# Altium PCB PCB_1.PcbDoc
Units mm, origin at the board's own origin, x right, y up, seen from the top; angles counter-clockwise.
Board outline 86.65 x 41.72 mm, 2 copper layers (Top Layer, Bottom Layer); 11 components, 8 nets, 24 pads, 1 vias.
Unrouted connection lines stored in the file: 4.
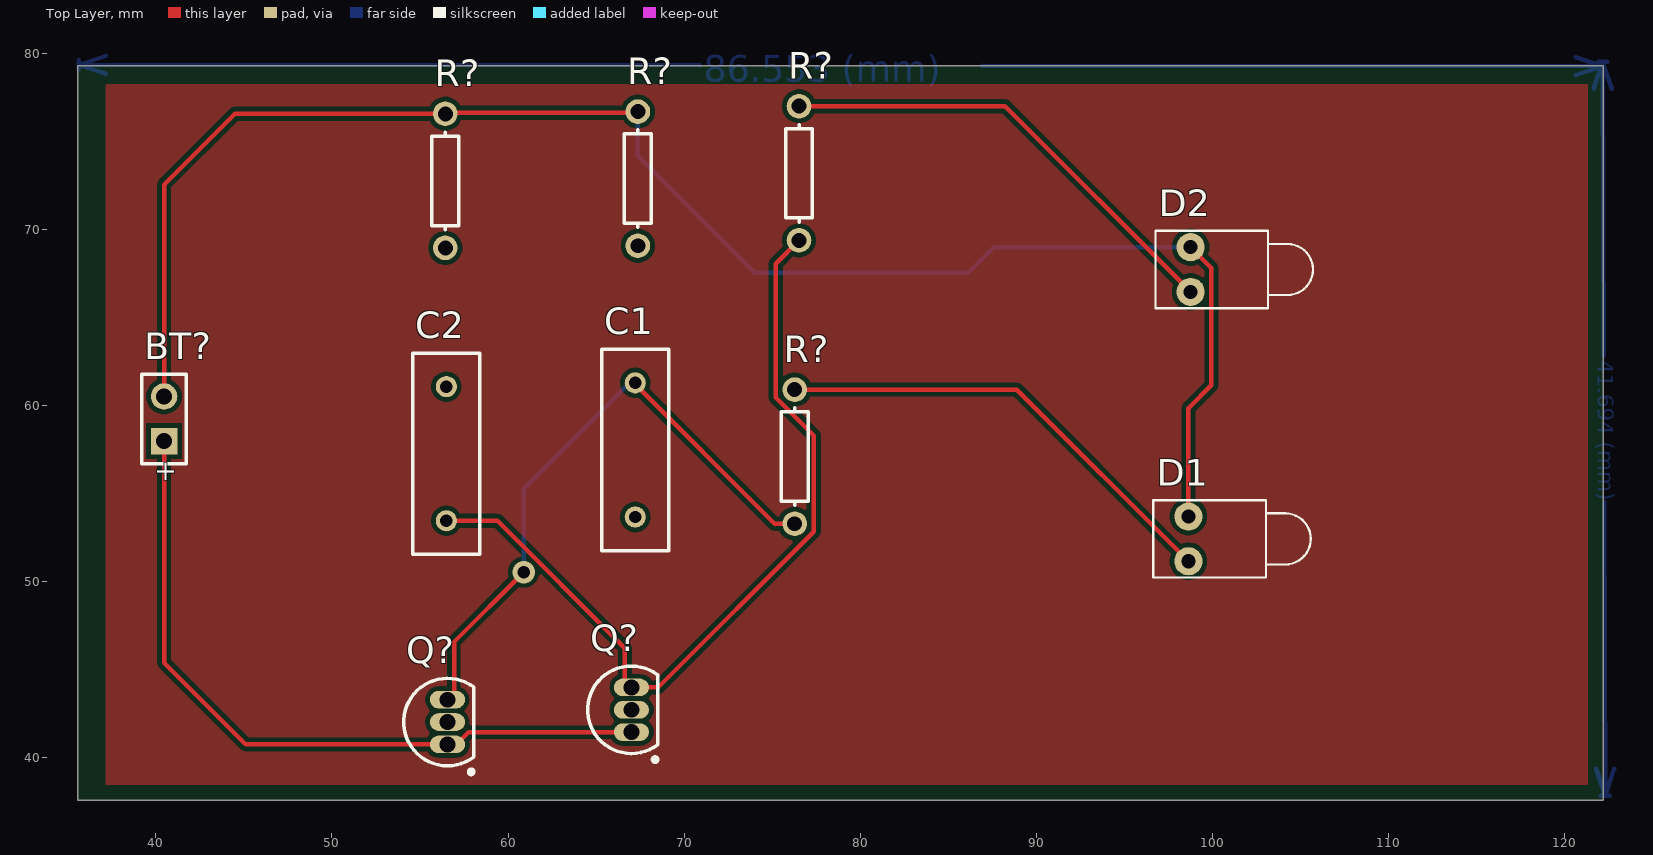
[diagram p0: Top Layer view]
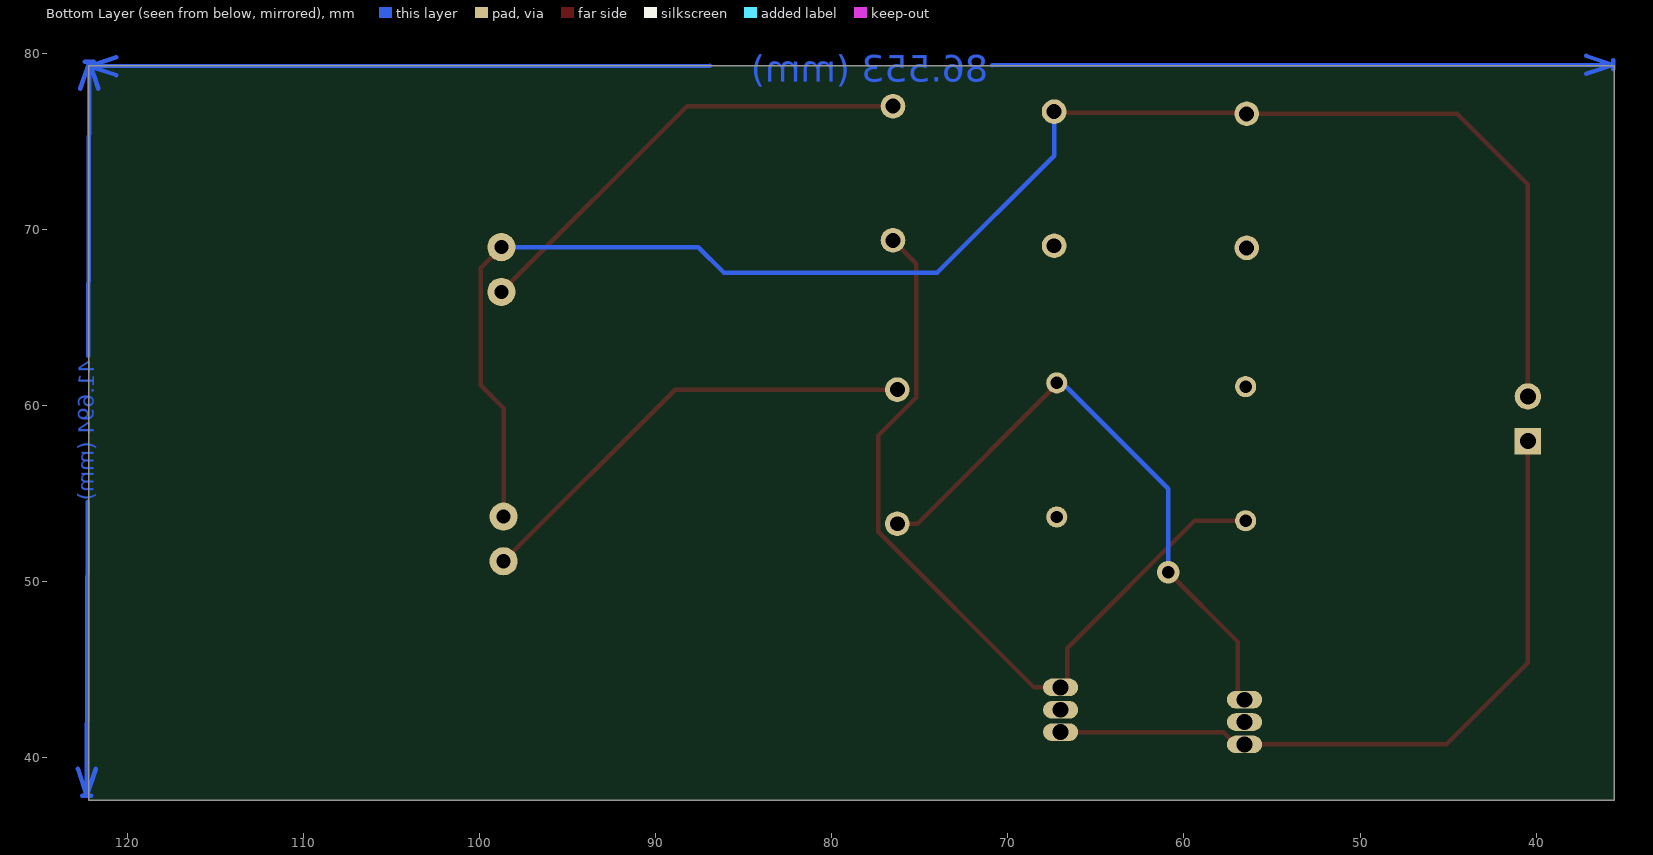
[diagram p1: Bottom Layer view, seen from below]

## Layer stack, top to bottom
Top Solder: solder mask 0.0102, Solder Resist, Dk 3.5
Top Layer: signal copper 0.0356
Dielectric 1: dielectric 0.32, FR-4, Dk 4.8
Bottom Layer: signal copper 0.0356
Bottom Solder: solder mask 0.0102, Solder Resist, Dk 3.5

## Board outline
35.571,37.572 122.219,37.572 122.219,79.296 35.571,79.296

## Design rules (kind name [scope] priority, off if disabled: settings)
Clearance [All] p1: gap=0.254 ignorepadtopadclearanceinfootprint=FALSE except(0: Arc-Hole Track-Hole SMDPad-Hole THPad-Hole Via-Hole Fill-Hole Poly-Hole Region-Hole Text-Hole)
PolygonConnect [All] p1: connectstyle=Relief reliefconductorwidth=0.254 reliefentries=4 polygonreliefangle="90 Angle" airgapwidth=0.254
RoutingVias [All] p1: holewidth=0.711 width=1.27 viastyle="Through Hole" minholewidth=0.711 minwidth=1.27 maxholewidth=0.711 maxwidth=1.27
SolderMaskExpansion [All] p1: expansion=0.102 istentingtop=FALSE
Width [All] p1: maxlimit=0.254 minlimit=0.254 preferedwidth=0.254
30 further rules are at their usual default settings.

## Classes and differential pairs
component class Schematic_1: BT? C2 D1 D2 Q? R? V?

## Components (designator, comment, footprint, x,y, rotation, side; value= is the part's Value field where it differs from the comment)
BT? "Battery" BAT-2 40.462,59.244 r90 top
C1 "Cap" RAD-0.3 67.228,57.475 r90 top value=100pF
C2 "Cap" RAD-0.3 56.499,57.262 r90 top value=100pF
D1 "LED1" LED-1 98.655,52.423 r0 top
D2 "LED1" LED-1 98.777,67.724 r0 top
Q? "2N3904" TO-92A 56.561,42.017 r0 top
Q? "2N3904" TO-92A 67.008,42.714 r0 top
R? "Res1" AXIAL-0.3 76.533,73.193 r90 top value=1K
R? "Res1" AXIAL-0.3 56.439,72.763 r90 top value=1K
R? "Res1" AXIAL-0.3 67.377,72.886 r90 top value=1K
R? "Res1" AXIAL-0.3 76.287,57.093 r90 top value=1K

## Footprints (in the part's own frame and the unit in brackets; to place one, negate y for a bottom-side part, rotate by r counter-clockwise, add the part's x,y. Pads: shape width x height; smd on the part's side, far side on the other; paste and mask are expansions set on the pad)
AXIAL-0.3 [mm] "Axial Device, Thru-Hole; 2 Leads; 0.3 in Pin Spacing"
  round 1.4 hole 0.85: 1(-3.81,0) 2(3.81,0)
  silkscreen extent -2.77,-0.76 2.77,0.76
BAT-2 [mm] "Battery; 2 Leads"
  rect 1.5x1.5 hole 0.9: 1(-1.27,0)
  round 1.5 hole 0.9: 2(1.27,0)
  silkscreen extent -2.54,-1.27 2.54,1.27
LED-1 [mm] "LED; 2 Leads"
  round 1.6 hole 0.8: 1(0,1.27) 2(0,-1.27)
  silkscreen extent -2,-2.2 6.95,2.2
RAD-0.3 [mm] "Radial Cap, Thru-Hole; 2 Leads; 0.3 in Pin Spacing"
  round 1.2 hole 0.7: 1(-3.81,0) 2(3.81,0)
  silkscreen extent -5.71,-1.91 5.71,1.91
TO-92A [mm] "TO, Flat Index; 3 In-Line, Axial Leads; Body Dia. 4.5mm; Leads 0.51 x 0.48 mm (max)"
  oval 2x1 hole 0.9: 1(0,-1.27) 2(0,0) 3(0,1.27)
  silkscreen extent -2.48,-2.95 1.5,2.48, body extent -2.48,-2.5 1.5,2.5, height 6.86

## Part data
BT?: "Multicell Battery", LatestRevisionDate=17-Jul-2002, LatestRevisionNote="Re-released for DXP Platform.", PackageDescription="Battery; 2 Leads", PackageReference=BAT-2, Published=24-Mar-1999, Publisher="Altium Limited"
C1 C2: "Capacitor", LatestRevisionDate=17-Jul-2002, LatestRevisionNote="Re-released for DXP Platform.", PackageDescription="Radial Cap, Thru-Hole; 2 Leads; 0.3 in Pin Spacing", PackageReference=RAD-0.3, Published=8-Jun-2000, Publisher="Altium Limited"
D1 D2: "Typical RED GaAs LED", LatestRevisionDate=08-Jul-2005, LatestRevisionNote="Mech Layer 1 removed.", PackageDescription="LED; 2 Leads", PackageReference=LED-1, Published=8-Jun-2000, Publisher="Altium Limited"
Q? Q?: "NPN General Purpose Amplifier", ComponentLink1Description="Manufacturer Link", ComponentLink1URL=http://www.fairchildsemi.com/, ComponentLink2Description=Datasheet, ComponentLink2URL=http://www.fairchildsemi.com/ds/2N%2F2N3904.pdf, DatasheetVersion=1997, LatestRevisionDate=15-Jan-2003, LatestRevisionNote="PCB Footprint 'BCY-W3/D4.7' replaced", PackageDescription="TO, Flat Index; 3 In-Line, Axial Leads; Body Dia. 4.5mm; Leads 0.51 x 0.48 mm (max)", PackageReference=TO-92A, PackageVersion=Sep-1998, Published=8-Jun-2000, Publisher="Altium Limited"
R? R? R? R?: "Resistor", LatestRevisionDate=17-Jul-2002, LatestRevisionNote="Re-released for DXP Platform.", PackageDescription="Axial Device, Thru-Hole; 2 Leads; 0.3 in Pin Spacing", PackageReference=AXIAL-0.3, Published=8-Jun-2000, Publisher="Altium Limited"

## Via types
v1: diameter 1.27, hole 0.711, Top Layer to Bottom Layer, 1 vias

## Nets (pads, with @x,y where several pads share a name; then routed paths per layer and width w, separated by ;. In a path a pad name is that pad's centre, name@x,y a point inside that pad or via, vN(x,y) a via of type N, cw(c..) or ccw(c..) an arc to the next point about the centre after c; other vN are vias at no path point)
NetBT?_1: BT?.1 Q?.1 | length 41.3
  Top Layer w0.254: BT?.1 40.462,45.391 45.105,40.747 56.561,40.747 57.061,40.747 57.758,41.444 Q?.1@67.008,41.444
NetBT?_2: BT?.2 D1.1 D2.1 R?.2@56.439,76.573 R?.2@67.377,76.696 | length 94.2
  Top Layer w0.254: BT?.2 40.462,72.545 44.489,76.573 56.439,76.573 56.5,76.634 67.315,76.634 R?.2@67.377,76.696 ; D1.1 98.655,59.848 99.958,61.152 99.958,67.813 D2.1
  Bottom Layer w0.254: R?.2@67.377,76.696 67.377,74.196 74.022,67.55 86.152,67.55 87.595,68.994 D2.1
NetC1_1: C1.1 Q?.2@67.008,42.714 R?.1@67.377,69.076
NetC1_2: C1.2 Q?.3@56.561,43.287 R?.1@76.287,53.283 | length 35.1
  Top Layer w0.254: Q?.3@56.561,43.287 56.59,43.287 56.934,43.632 56.934,46.565 v1(60.892,50.522) ; C1.2@67.022,61.404 75.143,53.283 R?.1@76.287,53.283
  Bottom Layer w0.254: v1(60.892,50.522) 60.892,55.275 C1.2@67.022,61.404
NetC2_1: C2.1 Q?.3@67.008,43.984 R?.1@76.533,69.383 | length 47.6
  Top Layer w0.254: C2.1 59.399,53.452 66.635,46.216 66.635,44.328 66.979,43.984 67.008,43.984 68.516,43.984 77.368,52.835 77.368,58.293 75.206,60.455 75.206,68.056 R?.1@76.533,69.383
NetC2_2: C2.2 Q?.2@56.561,42.017 R?.1@56.439,68.953
NetD1_2: D1.2 R?.2@76.287,60.903 | length 26.4
  Top Layer w0.254: R?.2@76.287,60.903 88.904,60.903 D1.2
NetD2_2: D2.2 R?.2@76.533,77.003 | length 26.6
  Top Layer w0.254: R?.2@76.533,77.003 88.228,77.003 D2.2
copper on no net: | length 118.8
  Bottom Layer w0.254: 35.627,79.095 35.628,79.603 ; 37.151,78.839 35.628,79.349 ; 37.152,79.855 35.628,79.349 ; 70.88,79.319 35.628,79.349 ; 86.928,79.305 122.181,79.275 ; 120.657,78.769 122.181,79.275 ; 120.658,79.785 122.181,79.275 ; 121.679,78.004 122.181,79.529 ; 121.815,39.358 122.328,37.835 ; 121.927,79.528 122.435,79.53 ; 122.074,37.835 122.582,37.836 ; 122.181,79.021 122.181,79.529 ; 122.24,62.83 122.181,79.529 ; 122.269,54.535 122.328,37.835 ; 122.695,78.007 122.181,79.529 ; 122.831,39.361 122.328,37.835

## Polygon pours and split planes (outlines as drawn)
no net on Top Layer "TOP_LAYER_NONET_P000" (solid, pour order 0): 37.154,38.467 121.402,38.467 121.328,38.541 121.328,78.239 37.227,78.239 37.154,78.313
no net on Top Component Center "BOTTOM_LAYER_NONET_P002" (solid, pour order 2): 38.403,77.357 38.477,77.283 38.477,39.35 120.446,39.35 120.593,39.203 120.74,39.35 120.74,77.577 38.697,77.577 38.55,77.43

## Other copper
Bottom Layer:
  text "86.553 (mm)" at 71.134,78.404 h1.52 r359.95
  text "41.694 (mm)" at 121.601,62.574 h1.52 r270.2

## Silkscreen, mask and mechanical layers (free items; w line width, h text height)
Bottom Courtyard:
  lines w0.254: 35.668,37.552 122.251,37.552 122.251,79.276 35.668,79.276 35.668,37.552

## Text inside footprints (layer, text, board x,y; h text height)
BT?: Top Overlay "+" at 41.039,55.574 h1.15 r90